# Altium PCB PCB12.pcbdoc
Units mm, origin at the board's own origin, x right, y up, seen from the top; angles counter-clockwise.
Board outline 183.15 x 75 mm, 2 copper layers (Top Layer, Bottom Layer); 117 components, 94 nets, 493 pads, 179 vias.
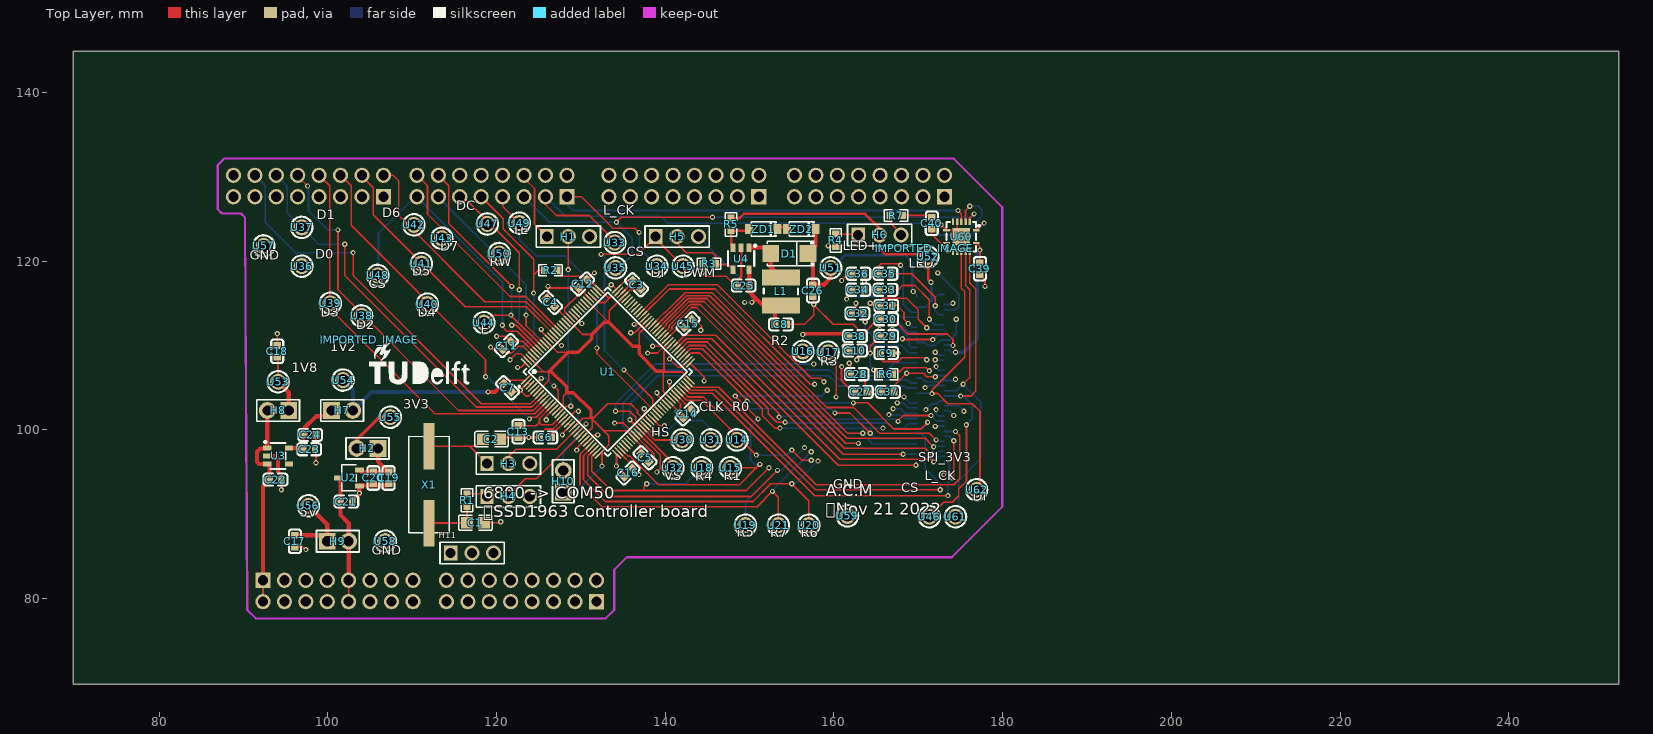
[diagram p0: Top Layer view]
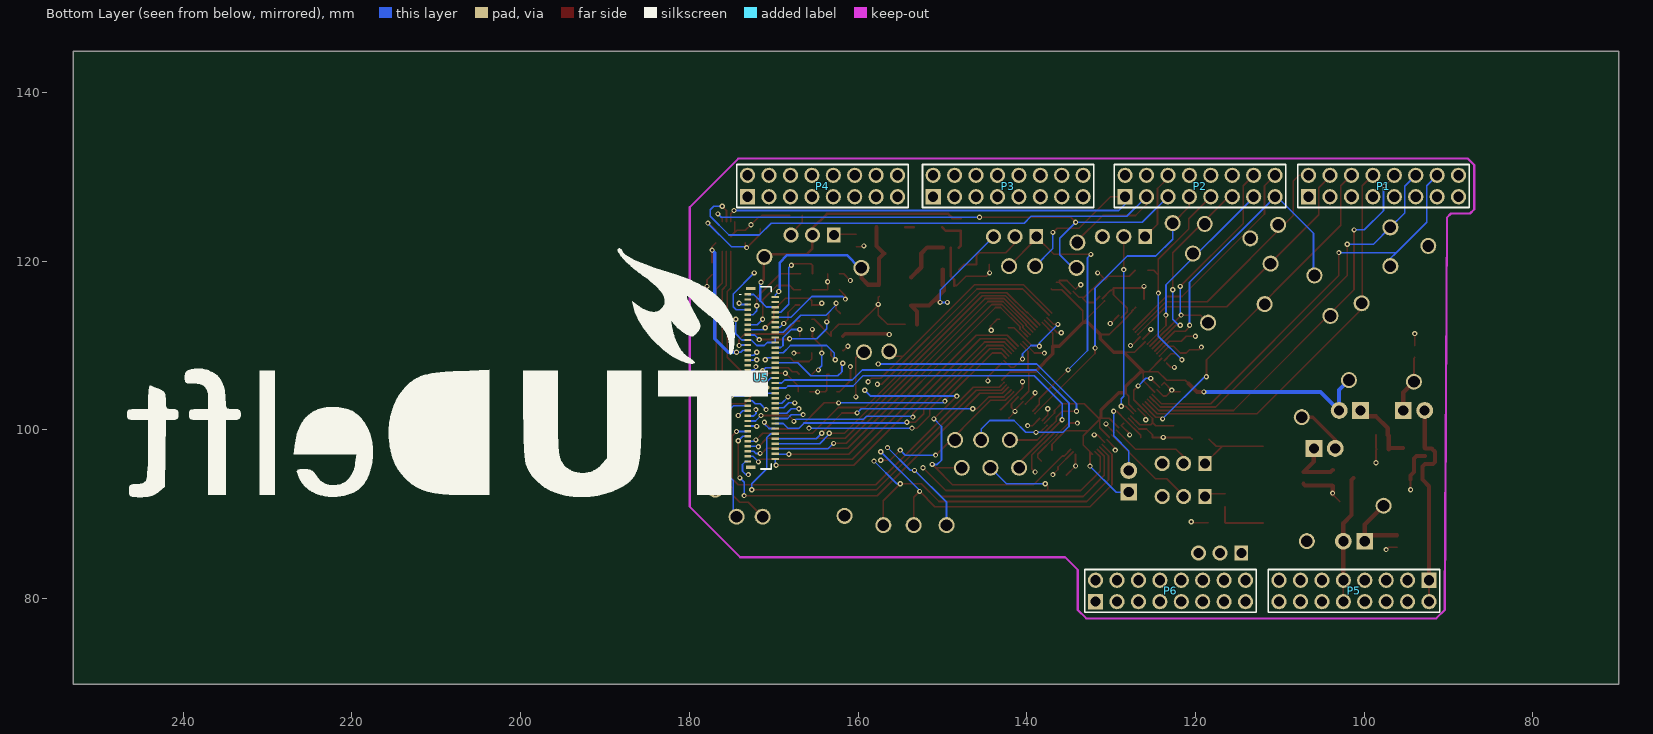
[diagram p1: Bottom Layer view, seen from below]

## Layer stack, top to bottom
Top Layer: signal copper (thickness not stored)
Dielectric: dielectric 0.32, FR-4, Dk 4.8
Bottom Layer: signal copper (thickness not stored)

## Board outline
252.996,69.85 69.85,69.85 69.85,144.85 252.996,144.85

## Components (designator, comment, footprint, x,y, rotation, side; value= is the part's Value field where it differs from the comment)
C1 "33pF" C0805 117.5,89 r180 top
C2 "33pF" C0805 119.4,98.9 r180 top
C3 "1uF" C0603 136.605,117.195 r315 top
C4 "100nF" C0603 126.4,115.1 r315 top
C5 "100nF" C0603 137.6,96.7 r135 top
C6 "1uF" C0603 125.8,99.1 r0 top
C7 "1uF" C0603 121.305,104.995 r135 top
C8 "10uF" C0603 153.7,112.5 r180 top
C9 "2.2uF" C0603 166.2,109.1 r0 top
C10 "2.2uF" C0603 162.5,109.4 r180 top
C11 "100nF" C0603 121.195,109.995 r45 top
C12 "100nF" C0603 130.205,117.305 r45 top
C13 "100nF" C0603 122.6,99.8 r90 top
C14 "100nF" C0603 142.605,101.905 r45 top
C15 "100nF" C0603 142.695,112.595 r225 top
C16 "100nF" C0603 135.6,94.9 r45 top
C17 "10uF" C0603 96.1,86.8 r90 top
C18 "10uF" C0603 94,109.3 r270 top
C19 "10uF" C0603 107.2,94.3 r90 top
C20 "100nF" C0603 105.4,94.3 r90 top
C21 "10uF" C0603 102.2,91.5 r180 top
C22 "10uF" C0603 93.8,94.1 r180 top
C23 "10uF" C0603 97.8,97.7 r180 top
C24 "100nF" C0603 97.9,99.4 r180 top
C25 "10uF" C0603 149.3,117.1 r0 top
C26 "10uF" C0603 157.5,116.5 r270 top
C27 "1uF" C0603 163.2,104.5 r0 top
C28 "10uF" C0603 162.7,106.6 r180 top
C29 "10uF" C0603 166.2,111.1 r0 top
C30 "2.2uF" C0603 166.2,113.1 r0 top
C31 "2.2uF" C0603 166.2,114.7 r180 top
C32 "2.2uF" C0603 162.8,113.8 r0 top
C33 "10uF" C0603 166.1,116.6 r180 top
C34 "2.2uF" C0603 162.9,116.6 r0 top
C35 "1uF" C0603 166.1,118.5 r180 top
C36 "2.2uF" C0603 162.9,118.5 r180 top
C37 "1uF" C0603 166.4,104.5 r180 top
C38 "10uF" C0603 162.5,111.1 r0 top
C39 "100nF" C0603 177.3,119.1 r270 top
C40 "100nF" C0603 171.6,124.5 r90 top
D1 "SS210" SMA_L4.3-W2.6-LS5.2-RD 154.7,120.9 r180 top
H1 "2.54-1*3P针" HDR-TH_3P-P2.54-V-M-1 128.5,122.9 r0 top
H2 "PZ254V-11-02P" HDR-TH_2P-P2.54-V-M 104.7,97.8 r180 top
H3 "2.54-1*3P针" HDR-TH_3P-P2.54-V-M-1 121.4,96 r0 top
H4 "2.54-1*3P针" HDR-TH_3P-P2.54-V-M-1 121.4,92.1 r0 top
H5 "2.54-1*3P针" HDR-TH_3P-P2.54-V-M-1 141.4,122.9 r0 top
H6 "2.54-1*3P针" HDR-TH_3P-P2.54-V-M-1 165.4,123.1 r0 top
H7 "PZ254V-11-02P" HDR-TH_2P-P2.54-V-M 101.7,102.3 r0 top
H8 "PZ254V-11-02P" HDR-TH_2P-P2.54-V-M 94.1,102.3 r180 top
H9 "PZ254V-11-02P" HDR-TH_2P-P2.54-V-M 101.2,86.8 r0 top
H10 "PZ254V-11-02P" HDR-TH_2P-P2.54-V-M 127.9,93.9 r90 top
H11 "2.54-1*3P针" HDR-TH_3P-P2.54-V-M-1 117.1,85.4 r0 top
IMPORTED_IMAGE "IMPORTED_IMAGE" IMPORTED_IMAGE 104.9,110.7 r0 top
IMPORTED_IMAGE "IMPORTED_IMAGE" IMPORTED_IMAGE 170.7,121.5 r0 top
L1 "15uH" IND-SMD_L4.5-W4.0_SCD0403T 153.7,116.4 r90 top
P1 "2.54-2*8P针" HDR-TH_16P-P2.54-V-M-R2-C8-S2.54 97.7,128.9 r180 bottom
P2 "2.54-2*8P针" HDR-TH_16P-P2.54-V-M-R2-C8-S2.54 119.45,128.9 r180 bottom
P3 "2.54-2*8P针" HDR-TH_16P-P2.54-V-M-R2-C8-S2.54 142.2,128.9 r180 bottom
P4 "2.54-2*8P针" HDR-TH_16P-P2.54-V-M-R2-C8-S2.54 164.2,128.9 r180 bottom
P5 "2.54-2*8P针" HDR-TH_16P-P2.54-V-M-R2-C8-S2.54 101.2,80.9 r0 bottom
P6 "2.54-2*8P针" HDR-TH_16P-P2.54-V-M-R2-C8-S2.54 122.95,80.9 r180 bottom
R1 "120Ω" R0603 116.5,91.653 r90 top
R2 "100kΩ" R0603 126.4,118.9 r0 top
R3 "100kΩ" R0603 145.2,119.7 r0 top
R4 "0603WAF220JT5E" R0603 160.2,122.447 r270 top
R5 "100Ω" R0603 147.8,124.347 r90 top
R6 "10kΩ" R0603 166.2,106.6 r180 top
R7 "10Ω" R0603 167.353,125.4 r0 top
U1 "SSD1963QL9" LQFP-128_L14.0-W14.0-P0.40-LS16.0-BL 133.2,106.9 r315 top
U2 "XC6206P332MR" SOT-23-3_L2.9-W1.6-P1.90-LS2.8-BR 102.5,94.3 r0 top
U3 "AP2127K-1.2TRG1" SOT-23-5_L3.0-W1.7-P0.95-LS2.8-BR 94.1,96.9 r180 top
U4 "-" SOT-23-5_L3.0-W1.7-P0.95-LS2.8-BR 149,120.3 r90 top
U5 "FH26G-67S-0.3SHBW_05_" FH26G67S03SHBW05 171.7,106.15 r270 bottom
U14 "5001" TEST-TH_BD2.54-P1.39 148.5,98.8 r0 top
U15 "5001" TEST-TH_BD2.54-P1.39 147.7,95.5 r0 top
U16 "5001" TEST-TH_BD2.54-P1.39 156.3,109.3 r0 top
U17 "5001" TEST-TH_BD2.54-P1.39 159.3,109.2 r0 top
U18 "5001" TEST-TH_BD2.54-P1.39 144.3,95.5 r0 top
U19 "5001" TEST-TH_BD2.54-P1.39 149.5,88.7 r0 top
U20 "5001" TEST-TH_BD2.54-P1.39 157,88.7 r0 top
U21 "5001" TEST-TH_BD2.54-P1.39 153.4,88.7 r0 top
U30 "5001" TEST-TH_BD2.54-P1.39 142,98.8 r0 top
U31 "5001" TEST-TH_BD2.54-P1.39 145.4,98.8 r0 top
U32 "5001" TEST-TH_BD2.54-P1.39 140.9,95.5 r0 top
U33 "5001" TEST-TH_BD2.54-P1.39 134,122.2 r0 top
U34 "5001" TEST-TH_BD2.54-P1.39 139,119.4 r0 top
U35 "5001" TEST-TH_BD2.54-P1.39 134.1,119.2 r0 top
U36 "5001" TEST-TH_BD2.54-P1.39 96.9,119.4 r0 top
U37 "5001" TEST-TH_BD2.54-P1.39 96.9,124 r0 top
U38 "5001" TEST-TH_BD2.54-P1.39 104,113.5 r0 top
U39 "5001" TEST-TH_BD2.54-P1.39 100.3,115 r0 top
U40 "5001" TEST-TH_BD2.54-P1.39 111.8,114.9 r0 top
U41 "5001" TEST-TH_BD2.54-P1.39 111.1,119.7 r0 top
U42 "5001" TEST-TH_BD2.54-P1.39 110.2,124.3 r0 top
U43 "5001" TEST-TH_BD2.54-P1.39 113.5,122.7 r0 top
U44 "5001" TEST-TH_BD2.54-P1.39 118.5,112.7 r0 top
U45 "5001" TEST-TH_BD2.54-P1.39 142.1,119.4 r0 top
U46 "5001" TEST-TH_BD2.54-P1.39 171.3,89.7 r180 top
U47 "5001" TEST-TH_BD2.54-P1.39 118.9,124.4 r0 top
U48 "5001" TEST-TH_BD2.54-P1.39 105.9,118.3 r0 top
U49 "5001" TEST-TH_BD2.54-P1.39 122.7,124.5 r0 top
U50 "5001" TEST-TH_BD2.54-P1.39 120.3,120.9 r0 top
U51 "5001" TEST-TH_BD2.54-P1.39 159.6,119.2 r0 top
U52 "5001" TEST-TH_BD2.54-P1.39 171.1,120.5 r0 top
U53 "5001" TEST-TH_BD2.54-P1.39 94.1,105.7 r0 top
U54 "5001" TEST-TH_BD2.54-P1.39 101.8,105.9 r0 top
U55 "5001" TEST-TH_BD2.54-P1.39 107.4,101.5 r0 top
U56 "5001" TEST-TH_BD2.54-P1.39 97.7,91 r0 top
U57 "5001" TEST-TH_BD2.54-P1.39 92.4,121.8 r0 top
U58 "5001" TEST-TH_BD2.54-P1.39 106.8,86.8 r0 top
U59 "5001" TEST-TH_BD2.54-P1.39 161.6,89.8 r0 top
U60 "TXB0104RGYR" VQFN-14_L3.5-W3.5-P0.50-BL-EP 175.1,122.9 r180 top
U61 "5001" TEST-TH_BD2.54-P1.39 174.4,89.7 r180 top
U62 "5001" TEST-TH_BD2.54-P1.39 176.9,92.9 r180 top
X1 "6MHz" HC-49S_L11.4-W4.8 112,93.5 r270 top
ZD1 "MMSZ5240B" SOD-123_L2.8-W1.8-LS3.7-RD 151.6,123.8 r180 top
ZD2 "MMSZ5240B" SOD-123_L2.8-W1.8-LS3.7-RD 156.1,123.8 r180 top

## Footprints (in the part's own frame and the unit in brackets; to place one, negate y for a bottom-side part, rotate by r counter-clockwise, add the part's x,y. Pads: shape width x height; smd on the part's side, far side on the other; paste and mask are expansions set on the pad)
C0603 [mm]
  rect 0.8x0.9 smd paste+0 mask+0.051: 1(-0.7,0) 2(0.7,0)
  silkscreen extent -1.41,-0.71 1.39,0.72
C0805 [mm]
  rect 1.41x1.35 smd paste-100 mask+0.051: 1(-1,0) 2(1,0)
  silkscreen extent -1.96,-0.9 1.96,0.9
FH26G67S03SHBW05 [mm]
  rect 0.28x0.8 smd paste+0 mask+0.102: 1(-9.9,-1.375) 3(-9.3,-1.375) 5(-8.7,-1.375) 7(-8.1,-1.375) 9(-7.5,-1.375) 11(-6.9,-1.375) 13(-6.3,-1.375) 15(-5.7,-1.375) 17(-5.1,-1.375) 19(-4.5,-1.375) 21(-3.9,-1.375) 23(-3.3,-1.375) 25(-2.7,-1.375) 27(-2.1,-1.375) 29(-1.5,-1.375) 31(-0.9,-1.375) 33(-0.3,-1.375) 35(0.3,-1.375) 37(0.9,-1.375) 39(1.5,-1.375) 41(2.1,-1.375) 43(2.7,-1.375) 45(3.3,-1.375) 47(3.9,-1.375) 49(4.5,-1.375) 51(5.1,-1.375) 53(5.7,-1.375) 55(6.3,-1.375) 57(6.9,-1.375) 59(7.5,-1.375) 61(8.1,-1.375) 63(8.7,-1.375) 65(9.3,-1.375) 67(9.9,-1.375)
  rect 0.28x0.9 smd paste+0 mask+0.102: 2(-9.6,1.875) 4(-9,1.875) 6(-8.4,1.875) 8(-7.8,1.875) 10(-7.2,1.875) 12(-6.6,1.875) 14(-6,1.875) 16(-5.4,1.875) 18(-4.8,1.875) 20(-4.2,1.875) 22(-3.6,1.875) 24(-3,1.875) 26(-2.4,1.875) 28(-1.8,1.875) 30(-1.2,1.875) 32(-0.6,1.875) 34(0,1.875) 36(0.6,1.875) 38(1.2,1.875) 40(1.8,1.875) 42(2.4,1.875) 44(3,1.875) 46(3.6,1.875) 48(4.2,1.875) 50(4.8,1.875) 52(5.4,1.875) 54(6,1.875) 56(6.6,1.875) 58(7.2,1.875) 60(7.8,1.875) 62(8.4,1.875) 64(9,1.875) 66(9.6,1.875)
  rect 0.4x1.15 smd paste+0 mask+0.102: MP1(-10.6,-1) MP2(10.6,-1)
  silkscreen extent -10.8,-2.3 10.8,1.4
HC-49S_L11.4-W4.8 [mm]
  rect 5.5x1.3 smd paste+0 mask+0.051: 1(-4.553,0) 2(4.553,0)
  silkscreen extent -5.72,-2.41 5.72,2.41
HDR-TH_2P-P2.54-V-M [mm]
  rect 2x2 hole 1.2 paste+0 mask+0.051: 1(-1.27,0)
  round 2 hole 1.2 paste+0 mask+0.051: 2(1.27,0)
  silkscreen extent -2.54,-1.27 2.54,1.27
HDR-TH_3P-P2.54-V-M-1 [mm]
  rect 1.575x1.8 hole 1.2 paste+0 mask+0.051: 1(-2.54,0)
  round 1.8 hole 1.2 paste+0 mask+0.051: 2(0,0) 3(2.54,0)
  silkscreen extent -3.81,-1.27 3.81,1.27
HDR-TH_16P-P2.54-V-M-R2-C8-S2.54 [mm]
  rect 1.8x1.8 hole 1.2 paste+0 mask+0.051: 1(-8.89,-1.27)
  round 1.8 hole 1.2 paste+0 mask+0.051: 2(-8.89,1.27) 3(-6.35,-1.27) 4(-6.35,1.27) 5(-3.81,-1.27) 6(-3.81,1.27) 7(-1.27,-1.27) 8(-1.27,1.27) 9(1.27,-1.27) 10(1.27,1.27) 11(3.81,-1.27) 12(3.81,1.27) 13(6.35,-1.27) 14(6.35,1.27) 15(8.89,-1.27) 16(8.89,1.27)
  silkscreen extent -10.16,-2.54 10.16,2.54
IMPORTED_IMAGE [mm]
  silkscreen extent 0,-5.3 11.9,0
IND-SMD_L4.5-W4.0_SCD0403T [mm]
  rect 1.9x4.5 smd paste+0 mask+0.051: 1(-1.675,0) 2(1.675,0)
  silkscreen extent -0.37,-2.03 0.37,2.03
LQFP-128_L14.0-W14.0-P0.40-LS16.0-BL [mm]
  rect 0.2x1.46 smd paste+0 mask+0.051: 1(-6.2,-7.63) 2(-5.8,-7.63) 3(-5.4,-7.63) 4(-5,-7.63) 5(-4.6,-7.63) 6(-4.2,-7.63) 7(-3.8,-7.63) 8(-3.4,-7.63) 9(-3,-7.63) 10(-2.6,-7.63) 11(-2.2,-7.63) 12(-1.8,-7.63) 13(-1.4,-7.63) 14(-1,-7.63) 15(-0.6,-7.63) 16(-0.2,-7.63) 17(0.2,-7.63) 18(0.6,-7.63) 19(1,-7.63) 20(1.4,-7.63) 21(1.8,-7.63) 22(2.2,-7.63) 23(2.6,-7.63) 24(3,-7.63) 25(3.4,-7.63) 26(3.8,-7.63) 27(4.2,-7.63) 28(4.6,-7.63) 29(5,-7.63) 30(5.4,-7.63) 31(5.8,-7.63) 32(6.2,-7.63) 65(6.2,7.63) 66(5.8,7.63) 67(5.4,7.63) 68(5,7.63) 69(4.6,7.63) 70(4.2,7.63) 71(3.8,7.63) 72(3.4,7.63) 73(3,7.63) 74(2.6,7.63) 75(2.2,7.63) 76(1.8,7.63) 77(1.4,7.63) 78(1,7.63) 79(0.6,7.63) 80(0.2,7.63) 81(-0.2,7.63) 82(-0.6,7.63) 83(-1,7.63) 84(-1.4,7.63) 85(-1.8,7.63) 86(-2.2,7.63) 87(-2.6,7.63) 88(-3,7.63) 89(-3.4,7.63) 90(-3.8,7.63) 91(-4.2,7.63) 92(-4.6,7.63) 93(-5,7.63) 94(-5.4,7.63) 95(-5.8,7.63) 96(-6.2,7.63)
  rect 1.46x0.2 smd paste+0 mask+0.051: 33(7.63,-6.2) 34(7.63,-5.8) 35(7.63,-5.4) 36(7.63,-5) 37(7.63,-4.6) 38(7.63,-4.2) 39(7.63,-3.8) 40(7.63,-3.4) 41(7.63,-3) 42(7.63,-2.6) 43(7.63,-2.2) 44(7.63,-1.8) 45(7.63,-1.4) 46(7.63,-1) 47(7.63,-0.6) 48(7.63,-0.2) 49(7.63,0.2) 50(7.63,0.6) 51(7.63,1) 52(7.63,1.4) 53(7.63,1.8) 54(7.63,2.2) 55(7.63,2.6) 56(7.63,3) 57(7.63,3.4) 58(7.63,3.8) 59(7.63,4.2) 60(7.63,4.6) 61(7.63,5) 62(7.63,5.4) 63(7.63,5.8) 64(7.63,6.2) 97(-7.63,6.2) 98(-7.63,5.8) 99(-7.63,5.4) 100(-7.63,5) 101(-7.63,4.6) 102(-7.63,4.2) 103(-7.63,3.8) 104(-7.63,3.4) 105(-7.63,3) 106(-7.63,2.6) 107(-7.63,2.2) 108(-7.63,1.8) 109(-7.63,1.4) 110(-7.63,1) 111(-7.63,0.6) 112(-7.63,0.2) 113(-7.63,-0.2) 114(-7.63,-0.6) 115(-7.63,-1) 116(-7.63,-1.4) 117(-7.63,-1.8) 118(-7.63,-2.2) 119(-7.63,-2.6) 120(-7.63,-3) 121(-7.63,-3.4) 122(-7.63,-3.8) 123(-7.63,-4.2) 124(-7.63,-4.6) 125(-7.63,-5) 126(-7.63,-5.4) 127(-7.63,-5.8) 128(-7.63,-6.2)
  silkscreen extent -7.08,-8.76 7.08,7.08
R0603 [mm]
  rect 0.806x0.864 smd paste-100 mask+0.051: 1(-0.753,0) 2(0.753,0)
  silkscreen extent -1.39,-0.66 1.39,0.66
SMA_L4.3-W2.6-LS5.2-RD [mm]
  rect 2x2 smd paste+0 mask+0.051: 1(-2.2,0) 2(2.2,0)
  silkscreen extent -2.98,-1.5 2.6,1.5
SOD-123_L2.8-W1.8-LS3.7-RD [mm]
  rect 0.95x1.15 smd paste+0 mask+0.051: 1(-1.692,0) 2(1.692,0)
  silkscreen extent -1.58,-0.87 1.41,0.87
SOT-23-3_L2.9-W1.6-P1.90-LS2.8-BR [mm]
  rect 1.07x0.6 smd paste+0 mask+0.051: 1(1.235,-0.95) 2(1.235,0.95) 3(-1.235,0)
  silkscreen extent -0.88,-1.54 0.88,1.54
SOT-23-5_L3.0-W1.7-P0.95-LS2.8-BR [mm]
  rect 1x0.6 smd paste+0 mask+0.051: 1(1.3,-0.95) 2(1.3,0) 3(1.3,0.95) 4(-1.3,0.95) 5(-1.3,-0.95)
  silkscreen extent -0.9,-1.78 1.65,1.55
TEST-TH_BD2.54-P1.39 [mm]
  round 1.9 hole 1.39 paste+0 mask+0.051: 1(0,0)
  silkscreen extent -1.27,-1.27 1.27,1.27
VQFN-14_L3.5-W3.5-P0.50-BL-EP [mm]
  rect 0.8x0.28 smd paste-100 mask+0.051: 1(-1.75,-0.75) 7(1.75,-0.75) 8(1.75,0.75) 14(-1.75,0.75)
  rect 0.28x0.8 smd paste-100 mask+0.051: 2(-0.998,-1.75) 3(-0.498,-1.75) 4(0.002,-1.75) 5(0.502,-1.75) 6(1.002,-1.75) 9(1,1.75) 10(0.5,1.75) 11(0,1.75) 12(-0.5,1.75) 13(-1,1.75)
  rect 2.05x2.05 smd paste-100 mask+0.051: 15(0,0)
  silkscreen extent -2.2,-1.75 1.75,1.75

## Via types
v1: diameter 0.61, hole 0.305, Top Layer to Bottom Layer, 179 vias

## Nets (pads, with @x,y where several pads share a name; then routed paths per layer and width w, separated by ;. In a path a pad name is that pad's centre, name@x,y a point inside that pad or via, vN(x,y) a via of type N, cw(c..) or ccw(c..) an arc to the next point about the centre after c; other vN are vias at no path point)
1V2: C3.2 C4.2 C5.2 C7.2 H7.2 H10.1 U1.1 U1.6 U1.14 U1.21 U1.25 U1.32 U1.40 U1.46 U1.56 U1.64 U1.73 U1.82 U1.93 U1.102 U1.110 U1.119 U1.126 U54.1 | length 129.7
  Top Layer w0.2: C7.2@120.81,105.49 121.209,105.889 U1.1 124.432,106.9 125.563,106.9 ; U1.126 125.563,106.9 ; U1.6 126.2,105.84 126.2,106.9 125.563,106.9 ; U1.119 127.223,109.2 128.5,109.2 ; U1.14 127.9,103.014 127.9,104 128.3,104.4 ; C4.2@127.1,114.5 127.553,114.047 127.553,113.961 U1.110 130.214,111.3 131.3,111.3 ; U1.21 130.208,101.362 131.338,101.362 ; U1.25 131.338,100.229 131.338,101.248 ; U1.102 133.266,112.774 ; U1.32 132.221,97.121 U1.32@132.5,97.4 ; v1(132.5,95.7) U1.32@132.5,97.4 ; 133.354,112.686 133.354,114.125 U1.93 135.829,116.6 137,116.6 C3.2 ; 136.9,109.9 136.9,111.449 U1.82 ; C5.2@137,97.6 137,98.292 U1.40 135.41,99.882 132.704,99.882 ; U1.46 136.7,101.986 136.7,102.3 135.9,103.1 133.189,103.1 131.338,101.248 ; U1.56 139.758,104.585 139.758,106.762 139.844,106.848 ; U1.73 139.844,109.301 139.844,106.956 139.844,106.848 ; U1.64 142.02,106.848 139.844,106.848 ; 131.338,101.248 132.704,99.882 ; U1.32@132.5,97.4 133.3,98.2 133.3,99.286 132.704,99.882
  Top Layer w0.4: 131.338,101.362 131.2,101.5 131.2,102.3 129.1,104.4 128.3,104.4 128.3,105.1 126.5,106.9 126.2,106.9 128.5,109.2 129.7,109.2 131.3,110.8 131.3,111.3 132.774,112.774 133.266,112.774 ; 133.354,112.686 136.14,109.9 136.9,109.9 136.9,109 138.944,106.956 139.844,106.956
  Top Layer w0.5: v1(119,104.5) 119.82,104.5 C7.2@120.81,105.49
  Bottom Layer w0.2: H10.1@127.9,92.6 129.4,92.6 v1(132.5,95.7)
  Bottom Layer w0.5: U54.1 102.97,104.73 H7.2 105.17,104.5 v1(119,104.5)
1V8: C11.2 C12.2 C13.2 C18.2 C40.1 H8.1 R2.2 U1.4 U1.12 U1.16 U1.95 U1.97 U1.100 U1.108 U1.117 U1.124 U53.1 U60.1 U60.8 | length 53.3
  Top Layer w0.2: C18.2 94.1,108.5 U53.1 ; v1(120,111.1) 121.08,111.1 C11.2 123.105,110.49 U1.124 ; C13.2 124.7,100.5 125.054,100.854 ; U1.4 125.3,106.071 v1(125.3,106.1) ; U1.117 127.554,110 v1(127.7,110) ; v1(126.8,105.2) 127.3,104.7 127.3,103.546 U1.12 125.1,101.346 125.1,100.9 125.054,100.854 ; R2.2 127.853,118.2 130.3,118.2 C12.2 ; U1.16 126.617,100.6 125.308,100.6 125.054,100.854 ; U1.108 130.046,112.6 v1(130.1,112.6) ; U1.100 132.071,115.1 132.9,115.1 133.377,115.577 133.377,115.7 ; v1(131.6,118.6) 131.5,118.6 C12.2 ; U1.95 133.797,115.7 133.377,115.7 ; C40.1 171.6,123.2 v1(173.2,121.6) 173.35,121.75 U60.8 ; U60.1 177.7,124.5 v1(177.8,124.5) ; C12.2 131.068,117.8 U1.97 132.221,116.679 133.2,115.7 133.377,115.7
  Top Layer w0.5: U53.1 95.37,104.43 H8.1
  Bottom Layer w0.2: v1(125.3,106.1) 125.9,106.1 v1(126.8,105.2) ; v1(173.2,121.6) 173.3,121.7 175,121.7 v1(177.8,124.5)
3V3: C14.2 C15.2 C16.2 C38.1 C39.1 H2.2 U1.27 U1.34 U1.42 U1.48 U1.54 U1.58 U1.66 U1.75 U1.84 U5.23 U55.1 U60.14 | length 95.6
  Top Layer w0.2: U1.27 131.64,99.4 v1(132,99.4) ; U1.34 136.297,95.6 136.3,95.6 136.3,95.3 v1(136.9,94.7) ; v1(136.3,112.5) 136.82,112.5 U1.84 ; U1.42 139.4,97.023 139.4,95.4 v1(139,95) ; U1.48 139.317,100.5 v1(139.9,100.5) ; v1(138.5,109.9) 139.311,109.9 U1.75 141.511,112.1 C15.2 ; v1(139,104.4) 139,104.211 U1.54 ; v1(140.5,105.7) 140.5,104.974 U1.58 143.074,102.4 C14.2 ; v1(140.5,108.4) 141.5,107.4 141.903,107.4 U1.66 ; U60.14 177.3,121.7 v1(177.3,121.3) C39.1
  Top Layer w0.4: H2.2 103.43,98.83 106.1,101.5 U55.1 ; v1(156.3,111.3) 156.4,111.4 161.5,111.4 C38.1
  Inner2 w0.2: U55.1 110.1,101.5 111.4,100.2
  Inner2 w0.4: 152.9,111.3 v1(156.3,111.3) 158.9,113.9 172.2,113.9 174.9,111.2 174.9,109.6 174.5,109.2 v1(174.4,109.2)
  Bottom Layer w0.2: v1(136.3,112.5) 138.5,110.3 v1(138.5,109.9) 138.6,110 139.5,110 140.5,109 v1(140.5,108.4) ; U5.23 173.65,109.45 173.9,109.2 v1(174.4,109.2)
  Bottom Layer w0.4: v1(174.4,109.2) 175.4,109.2 177,110.8 177,121 v1(177.3,121.3)
5V: C8.2 C17.2 C25.2 H5.3 H9.1 L1.1 U4.5 U56.1 | length 96.6
  Top Layer w0.5: C17.2 99.23,87.5 H9.1 99.93,88.77 U56.1 ; U4.5 149.95,117.1 149.8,117.1 149.8,116.5 150.731,115.569 ; v1(150.261,115.1) 150.731,115.569 ; C8.2 153,114.025 L1.1 151.575,114.725 150.731,115.569
  Inner2 w0.5: U56.1 97.7,91.8 100.6,94.7 100.6,98.7 102,100.1 104.2,100.1 105,100.9 105,102.722 106.078,103.8 106.086,103.793 133.793,103.793 145.1,115.1 v1(149.4,115.1)
  Bottom Layer w0.2: H5.3 150.261,116.579 v1(150.261,115.1) v1(149.4,115.1)
$1N1944: C1.2 R1.1 X1.2 | length 6.4
  Top Layer w0.2: X1.2 116.447,88.947 C1.2 R1.1@116.5,90.9
$1N34225: C6.2 H10.2 U1.18 | length 12.4
  Top Layer w0.2: C6.2 126.5,99.352 U1.18 129.348,102.2 v1(129.7,102.2)
  Bottom Layer w0.2: H10.2@127.9,95.14 127.9,97.5 129.7,99.3 v1(129.7,102.2)
$2N8153: D1.2 L1.2 U4.1 | length 6.2
  Top Layer w0.5: U4.1 151.8,121.6 D1.2 152.5,119.275 L1.2
$2N8349: R5.1 U4.3 ZD1.2 | length 4.5
  Top Layer w0.3: U4.3 147.8,121.85 R5.1 149.601,123.593 ZD1.2@150.008,124
$2N9182: ZD1.1 ZD2.2 | length 1
  Top Layer w0.3: ZD1.1@153.392,124 ZD2.2@154.408,124
$2N12518: H6.1 R4.1 | length 2.7
  Top Layer w0.2: R4.1 162.76,123.2 H6.1
$2N12753: H6.3 R7.1 | length 2.9
  Top Layer w0.2: R7.1 166.6,124.6 167.94,123.26 H6.3
$2N22842: C19.2 C20.2 H2.1 U2.2 | length 6.9
  Top Layer w0.5: U2.2 103.985,95 C20.2 C19.2 105.97,96.23 H2.1
$2N23018: C23.2 C24.2 H7.1 U3.5 | length 8.4
  Top Layer w0.5: U3.5 96.95,97.85 C23.2 97.1,99.3 C24.2 97.2,100.2 98.6,101.6 99.73,101.6 H7.1
$3N2127: C27.1 U5.31 | length 17.2
  Top Layer w0.2: v1(160.9,107.5) 160.9,105.8 162.2,104.5 C27.1
  Inner2 w0.2: v1(160.9,107.5) 161.4,107 162.6,107 163.7,108.1 170.2,108.1 170.6,107.7 171.9,107.7 v1(172.1,107.5)
  Bottom Layer w0.2: v1(172.1,107.5) 172.1,107.3 172.35,107.05 U5.31
$3N2261: R6.1 U5.30 | length 6.4
  Top Layer w0.2: R6.1 167.253,106.9 167.8,106.9 168.25,107.35 170.95,107.35 v1(171.3,107)
  Bottom Layer w0.2: U5.30 170.95,107.35 v1(171.3,107)
$3N2380: C28.2 U5.28 | length 11.2
  Top Layer w0.2: v1(161.8,107.9) 162,107.7 C28.2
  Bottom Layer w0.2: v1(161.8,107.9) 161.9,107.8 161.9,106.9 162.4,106.4 165.6,106.4 167.15,107.95 U5.28
$3N2608: C9.2 U5.27 | length 6.5
  Top Layer w0.2: C9.2 v1(167.6,109.1)
  Inner2 w0.2: v1(167.6,109.1) 171.2,109.1 v1(172,108.3)
  Bottom Layer w0.2: v1(172,108.3) 172.05,108.25 U5.27
$3N2615: C10.1 U5.24 | length 9.9
  Top Layer w0.2: v1(162.7,108.3) 163.2,108.8 C10.1
  Bottom Layer w0.2: v1(162.7,108.3) 162.8,108.4 162.8,109.1 163.7,110 168,110 168.85,109.15 U5.24
$3N2865: C29.2 U5.22 | length 5.1
  Top Layer w0.2: C29.2 v1(166.9,111.9)
  Bottom Layer w0.2: v1(166.9,111.9) 167.9,111.9 168.9,110.9 168.9,110 169.15,109.75 U5.22
$3N3020: C30.2 U5.21 | length 9.9
  Top Layer w0.2: C30.2@166.9,112.9 167.3,112.9 167.6,112.6 167.6,112.5 168.743,111.357 173.443,111.357 174.1,110.7 v1(174.1,110)
  Bottom Layer w0.2: U5.21 174.05,110.05 v1(174.1,110)
$3N3372: C32.2 U5.17 | length 12
  Top Layer w0.2: C32.2 163.5,113 v1(163.7,112.8) ; v1(168.1,110.8) 168.2,110.7 v1(171.7,110.7)
  Bottom Layer w0.2: v1(163.7,112.8) 163.7,112 164.9,110.8 v1(168.1,110.8) ; v1(171.7,110.7) 172.25,111.25 U5.17
$3N3385: C31.1 U5.14 | length 4.5
  Top Layer w0.2: C31.1@166.9,114.8 167.4,114.8 168.3,113.9 168.3,113.1 v1(168.8,112.6)
  Bottom Layer w0.2: v1(168.8,112.6) 169.248,112.152 U5.14@169.825,112.152
$3N3630: C33.1 U5.13 | length 9.8
  Top Layer w0.2: C33.1 167.6,116.6 168.1,117.1 169.6,117.1 171.3,115.4 v1(171.3,113.1)
  Bottom Layer w0.2: v1(171.3,113.1) 171.95,112.45 U5.13
$3N3916: C34.1 U5.10 | length 10.9
  Top Layer w0.2: v1(161.5,115.5) 161.5,115.9 C34.1
  Bottom Layer w0.2: v1(161.5,115.5) 161.8,115.8 165.5,115.8 167.95,113.35 U5.10
$3N4074: C35.1 U5.9 | length 9.2
  Top Layer w0.2: C35.1 169.2,118.5 172,115.7 v1(172,114.7)
  Bottom Layer w0.2: v1(172,114.7) 172,114.1 172.45,113.65 U5.9
$3N4370: C36.2 U5.7 | length 20.3
  Top Layer w0.2: v1(160.9,117.7) 161.7,118.5 C36.2
  Inner2 w0.2: v1(160.9,117.7) 161.7,118.5 172.2,118.5 v1(172.3,118.6)
  Bottom Layer w0.2: v1(172.3,118.6) 174.8,116.1 174.8,114.6 174.45,114.25 U5.7
$3N5052: C37.1 U5.33 | length 7.6
  Top Layer w0.2: C37.1 167.1,105.2 v1(168.6,106.7) 170.6,106.7 171,106.3 v1(172,106.3)
  Bottom Layer w0.2: v1(172,106.3) 172,106.4 172.05,106.45 U5.33
APO_1V8: C22.2 H8.2 P5.1 P5.2 U3.1 U3.3 | length 25.1
  Top Layer w0.2: P5.2 P5.1
  Top Layer w0.5: P5.1 92.31,93.31 C22.2 93.1,95.65 U3.3 91.85,95.95 91.6,96.2 91.6,97.4 92,97.8 92.75,97.8 U3.1 ; U3.1@92.83,97.88 H8.2
APO_5V: C21.2 H9.2 P5.9 P5.10 U2.3 | length 15.2
  Top Layer w0.2: P5.10 P5.9
  Top Layer w0.5: U2.3 101.5,94.065 C21.2 101.5,89.9 102.47,88.93 H9.2 P5.9
BKL_DIMM: H5.2 R3.2 U4.4 | length 9.3
  Top Layer w0.2: H5.2 141.4,122.1 142.5,121 145.6,121 145.953,120.647 145.953,119.6 147.45,119.6 U4.4
GND: C1.1 C2.1 C3.1 C4.1 C5.1 C6.1 C7.1 C8.1 C11.1 C12.1 C13.1 C14.1 C15.1 C16.1 C17.1 C18.1 C19.1 C20.1 C21.1 C22.1 C23.1 C24.1 C25.1 C26.2 C27.2 C28.1 C30.1 C33.2 C34.2 C36.1 C37.2 C38.2 C39.2 C40.2 H1.3 H3.3 H11.1 H11.2 H11.3 P1.16 P5.11 P5.12 R3.1 R4.2 R7.2 U1.2 U1.3 U1.5 U1.13 U1.17 U1.19 U1.20 U1.23 U1.26 U1.33 U1.41 U1.47 U1.55 U1.57 U1.65 U1.74 U1.83 U1.94 U1.96 U1.101 U1.109 U1.118 U1.125 U1.128 U2.1 U3.2 U4.2 U5.18 U5.19 U5.20 U5.34 U5.35 U57.1 U58.1 U59.1 U60.5 U60.7 U60.15 | length 152.2
  Top Layer w0.2: C18.1 v1(94,111.4) ; v1(94.5,92.9) C22.1 ; C17.1 97.1,86.1 v1(97.4,85.8) ; v1(98.6,96.1) 98.6,97.6 98.5,97.7 98.6,97.8 C24.1 ; C21.1 v1@103.735,92.335 ; C1.1 120.4,89 v1(120.5,89.1) ; v1(119.3,109.8) 119.6,109.5 C11.1 121.1,109.1 121.8,109.1 122.6,109.9 123.129,109.9 U1.125 ; C2.1 120.6,99.1 C13.1 v1(123.815,99.1) C6.1 125.1,99.4 125.8,100.1 126.683,100.1 U1.17 ; C7.1 122.597,104.5 v1(122.805,104.707) ; v1(122.5,107.4) 122.91,107.4 U1.128 ; U1.3 U1.2 v1(122.805,104.707) ; U1.5 123.795,104 123.5,104 122.805,104.695 v1(122.805,104.707) ; v1(125.3,111.9) 125.3,111.689 U1.118 ; v1(125.9,101.2) 125.9,101.58 U1.13 ; v1(126.1,117) v1@126.11,116.99 ; C4.1@126.11,115.49 v1@126.11,116.99 ; v1(127.8,99.4) 127.8,99.52 U1.20 U1.19 ; U1.109 128.1,113.98 128.1,114.4 129.71,116.01 C12.1 ; v1(129.5,97.6) 129.5,97.826 U1.26 ; U1.23 130.6,100.623 v1(130.6,100.7) ; U1.101 130.099,116.507 130.014,116.507 C12.1 ; v1(133.6,117.2) 133.69,117.2 U1.96 135.222,117.69 C3.1 ; v1(134,100.8) 135.057,100.8 U1.41 136.474,99.326 138.7,97.1 138.7,96.72 C5.1@138.29,96.31 ; U1.33 v1(134.211,95.709) C16.1@135.31,94.61 ; U1.94 136.163,117.5 136.5,117.5 ; v1(135.9,111.5) 136.386,111.5 U1.83 ; v1(137.5,102.5) 137.5,101.752 U1.47 ; v1(137.9,109.1) 139.077,109.1 U1.74 ; U1.55 141.392,102.385 v1(141.392,102.192) ; U1.57 141.8,103.108 141.8,102.6 v1(141.392,102.192) ; C14.1 141.392,102.128 v1(141.392,102.192) ; U1.65 144.6,106.29 v1(144.6,105.8) ; C15.1 143.51,113.09 144.3,112.3 144.3,111.9 v1(144.2,111.8) ; R3.1@144.447,119.6 144.447,118.647 v1(144.4,118.6) 144.8,118.2 147.2,118.2 148.3,117.1 C25.1 ; C8.1 156.5,112.5 157.6,113.6 v1@157.6,114.8 ; C26.2 157.6,115.7 v1(157.6,114.864) v1@157.6,114.8 ; v1(159.3,121.8) 159.407,121.693 R4.2 ; C28.1 163.7,106.6 163.7,104.7 C27.2 v1(164.792,104.5) C37.2 ; C36.1 v1(163.6,117.556) C34.2 C33.2 ; C30.1@165.5,113.1 165.2,113.1 C38.2 163.2,111.6 162.3,112.5 159.9,112.5 v1@157.6,114.8 ; R7.2 171.4,125.4 C40.2 171.8,125.2 v1(172.687,124.313) U60.7 174.35,123.65 U60.15@174.598,123.402 ; U60.5 U60.15@174.598,123.402 ; U60.15 U60.15@174.598,123.402 ; C39.2 177.9,117.8 v1(177.9,117) ; v1@126.11,116.99 126.29,116.81 C12.1
  Top Layer w0.3: C25.1 148.6,117.8 149,118.2 U4.2
  Top Layer w0.5: U3.2 93.8,96.9 94.1,96.6 94.1,95 94.5,94.6 C22.1 ; v1@103.735,92.335 U2.1 103.785,93.4 107,93.4 C19.1
  Bottom Layer w0.2: U5.34 170.35,106.15 170.8,105.7 172.5,105.7 172.65,105.85 U5.35 174.25,105.85 v1(174.4,106) ; U5.18 U5.20 170.75,110.35 171.1,110 172,110 172.65,110.65 U5.19 173.775,110.65 174.5,111.375 v1(174.5,113.1)
  other v1: 103.735,92.5
GP_11_TE: P2.7 U1.50 U49.1 | length 35.3
  Top Layer w0.2: P2.7 120.72,126.48 U49.1 ; v1(131.9,109.7) 131.9,109.048 U1.50
  Bottom Layer w0.2: U49.1 122.7,122.6 124.7,120.6 128.1,120.6 131.9,116.8 v1(131.9,109.7)
GP_33_SSDCLK: H1.1 P2.6 | length 8.4
  Top Layer w0.2: P2.6 123.26,129.84 124.5,128.6 124.5,124.36 H1.1
GP_52_RW: P2.13 U1.120 U50.1 | length 22.7
  Top Layer w0.2: v1(123.5,113.6) 123.5,112.357 U1.120
  Bottom Layer w0.2: P2.13 113.1,127.588 123.5,117.188 v1(123.5,113.6)
GP_53_CS: P2.15 U1.123 U48.1 | length 36.4
  Top Layer w0.2: v1(120.7,112.4) 120.7,112.2 121.2,111.7 122.46,111.7 U1.123
  Bottom Layer w0.2: U48.1 106,118.4 106,123.3 110.33,127.63 P2.15 120.7,117.49 v1(120.7,112.4)
GP_64_D0: P1.14 U1.7 U36.1 | length 51.4
  Top Layer w0.2: v1(103,121) 103,118.3 118.2,103.1 124.026,103.1 U1.7
  Bottom Layer w0.2: P1.14 92.601,128.919 92.601,124.599 96.2,121 ; U36.1 96.9,120.3 96.2,121 ; v1(103,121) 96.2,121
GP_65_D1: P1.12 U1.8 U37.1 | length 47.4
  Top Layer w0.2: v1(102,122) 102,118.3 117.6,102.7 124.192,102.7 U1.8
  Bottom Layer w0.2: P1.12 95.2,128.86 95.2,125.7 U37.1 98.9,122 v1(102,122)
GP_66_D2: P1.10 U1.9 U38.1 | length 47.2
  Top Layer w0.2: P1.10 96.43,130.07 v1(97.6,128.9) ; v1(101.2,123.7) 101.2,116.6 115.5,102.3 124.357,102.3 U1.9
  Bottom Layer w0.2: v1(97.6,128.9) 97.7,128.8 97.7,126 100,123.7 v1(101.2,123.7)
GP_67_D3: P1.8 U1.10 U39.1 | length 47.8
  Top Layer w0.2: P1.8 100.221,128.919 100.221,114.379 112.7,101.9 124.523,101.9 U1.10
GP_68_D4: P1.6 U1.11 U40.1 | length 41.3
  Top Layer w0.2: P1.6 102.761,128.919 102.761,124.239 118.7,108.3 v1(118.7,106.3) ; v1(123.9,101.3) 124.1,101.5 124.689,101.5 U1.11
  Bottom Layer w0.2: v1(118.7,106.3) 118.9,106.3 v1(123.9,101.3)
GP_69_D5: P1.4 U1.116 U41.1 | length 32.5
  Top Layer w0.2: P1.4 104.05,130.05 105.4,128.7 105.4,125.5 116.3,114.6 123.52,114.6 U1.116
GP_70_D6: P1.2 U1.115 U42.1 | length 30.6
  Top Layer w0.2: P1.2 107.73,130.17 108.4,129.5 108.4,125.4 118.6,115.2 123.486,115.2 U1.115
GP_71_D7: P2.16 U1.114 U43.1 | length 26.4
  Top Layer w0.2: P2.16 111.811,128.919 111.811,125.589 121.6,115.8 123.452,115.8 U1.114
GP_72_E: P2.14 U1.121 U44.1 | length 29
  Top Layer w0.2: P2.14 114.351,128.919 114.351,124.449 v1(121.8,117) ; U44.1 119.4,113.6 v1(121.7,113.6) 125.401,109.899 U1.121
  Bottom Layer w0.2: v1(121.7,113.6) 121.8,113.7 v1(121.8,117)
GP_90_RESET: P2.9 R2.1 U1.127 | length 27.3
  Top Layer w0.2: P2.9 120.8,125.01 120.8,123.8 124.4,120.2 124.4,118.357 ; v1(121.6,108.3) 122.3,109 122.897,109 U1.127 ; v1(124.4,116.2) 124.4,118.357 ; R2.1 124.943,118.9 124.4,118.357
  Bottom Layer w0.2: v1(121.6,108.3) 124.4,111.1 v1(124.4,116.2)
GP_91_DC: P2.11 U1.122 U47.1 | length 23.4
  Top Layer w0.2: P2.11 116.07,127.63 122.7,121 v1(122.7,116.6) ; v1(121.8,112.4) 122.326,112.4 U1.122
  Bottom Layer w0.2: v1(121.8,112.4) 122,112.4 122.7,113.1 v1(122.7,116.6)
LCD_B0: U1.81 U5.59 | length 43.5
  Top Layer w0.2: U1.81 139.917,113.9 140.002,113.9 142.364,116.262 145.538,116.262 159.157,102.643 162.357,102.643 165.4,99.6 171.3,99.6 v1(172.1,98.8)
  Bottom Layer w0.2: v1(172.1,98.8) 172.25,98.65 U5.59
LCD_B1: U1.80 U5.60 | length 40
  Top Layer w0.2: U1.80 138.754,112.154 142.51,115.91 145.29,115.91 161.6,99.6 v1(163.4,99.6)
  Bottom Layer w0.2: v1(163.4,99.6) 163.4,99.5 164.55,98.35 U5.60
LCD_B2: U1.79 U5.61 | length 42.9
  Top Layer w0.2: U1.79 139.743,112.594 139.743,112.643 142.657,115.557 144.941,115.557 161.498,99 170.8,99 v1(171.8,98)
  Bottom Layer w0.2: v1(171.8,98) 172,98 172.05,98.05 U5.61
LCD_B3: U1.78 U5.62 | length 39.3
  Top Layer w0.2: U1.78 140.095,112.381 140.095,112.495 142.805,115.205 144.595,115.205 161.4,98.4 v1(162.9,98.4)
  Bottom Layer w0.2: v1(162.9,98.4) 163.55,97.75 U5.62
LCD_B4: U1.77 U5.63 | length 42.5
  Top Layer w0.2: U1.77 139.653,111.305 140.448,112.1 140.448,112.348 142.952,114.852 144.148,114.852 161.2,97.8 170.8,97.8 171.4,97.2 v1(171.6,97.2)
  Bottom Layer w0.2: v1(171.6,97.2) 172.125,97.2 172.375,97.45 U5.63
LCD_B5: U1.76 U5.64 | length 38.8
  Top Layer w0.2: U1.76 140.8,111.954 140.8,112.2 143.1,114.5 143.7,114.5 161.1,97.1 v1(168.2,97.1)
  Bottom Layer w0.2: v1(168.2,97.1) 169.775,97.1 U5.64
LCD_B6: U1.72 U5.65 | length 39.2
  Top Layer w0.2: U1.72 142.308,111.2 146,111.2 160.7,96.5 171.6,96.5 171.8,96.3 v1(171.8,96.2)
  Bottom Layer w0.2: v1(171.8,96.2) 172.45,96.85 U5.65
LCD_B7: U1.71 U5.66 | length 35.9
  Top Layer w0.2: U1.71 142.474,110.8 145.5,110.8 160.5,95.8 v1(169.7,95.8)
  Bottom Layer w0.2: v1(169.7,95.8) 169.825,95.925 U5.66
LCD_CLK: U1.45 U5.36 U31.1 | length 54.5
  Top Layer w0.2: U1.45 138.42,99.7 v1(138.9,99.7)
  Bottom Layer w0.2: U31.1 145.4,100.1 144.4,101.1 141.5,101.1 140.1,99.7 v1(138.9,99.7) 135.7,99.7 135,100.4 135,103.2 138.9,107.1 159.5,107.1 160.7,105.9 168.7,105.9 169.05,105.55 U5.36
LCD_CP_F: C9.1 U5.26 | length 7.9
  Top Layer w0.2: C9.1@165.5,109.1 165.5,108.4 165.8,108.1 167.6,108.1 168.05,108.55 170.75,108.55 v1(171,108.3)
  Bottom Layer w0.2: U5.26 170.75,108.55 v1(171,108.3)
LCD_CP_H: C31.2 U5.15 | length 11.8
  Top Layer w0.2: v1(164.3,115) 164.5,114.8 C31.2@165.5,114.8 ; C31.2@165.5,114.7 C31.2@165.5,114.8 ; v1(171,112.1) 170,113.1 170,114.2 168.6,115.6 165.8,115.6 165.5,115.3 C31.2@165.5,114.8
  Bottom Layer w0.2: v1(171,112.1) 171.25,111.85 U5.15
LCD_CP_S: C10.2 U5.25 | length 13.1
  Top Layer w0.2: v1(161.2,109.9) 161.7,109.4 C10.2
  Inner2 w0.2: v1(161.2,109.9) 161.443,109.657 171.343,109.657 171.8,109.2 v1(172,109.2)
  Bottom Layer w0.2: v1(172,109.2) 172.35,108.85 U5.25
LCD_CP_U: C32.1 U5.16 | length 10.2
  Top Layer w0.2: C32.1 162.6,114.3 v1(162.6,115)
  Bottom Layer w0.2: v1(162.6,115) 162.6,114.8 163.8,113.6 166.8,113.6 168.85,111.55 U5.16
LCD_CP_Z: C35.2 U5.8 | length 10.4
  Top Layer w0.2: C35.2 165.4,119.5 165.6,119.7 167.7,119.7 v1(167.9,119.5)
  Bottom Layer w0.2: v1(167.9,119.5) 168.2,119.2 168.2,114.9 169.15,113.95 U5.8
LCD_G0: U1.70 U5.51 | length 36.8
  Top Layer w0.2: U1.70 142.64,110.4 145,110.4 153.5,101.9 v1(153.5,101.5) ; v1(167.6,101) 167.6,101.1 168.2,101.7 v1(171.5,101.7)
  Bottom Layer w0.2: v1(153.5,101.5) 153.6,101.6 159,101.6 159.357,101.243 167.357,101.243 v1(167.6,101) ; v1(171.5,101.7) 172.15,101.05 U5.51
LCD_G1: U1.69 U5.52 | length 33
  Top Layer w0.2: U1.69 142.805,110 144.7,110 152.2,102.5 152.2,101.9 153.2,100.9 v1(154.2,100.9)
  Bottom Layer w0.2: v1(154.2,100.9) 154.3,100.8 166.4,100.8 167,100.2 168.3,100.2 168.85,100.75 U5.52
LCD_G2: U1.68 U5.53 | length 35.8
  Top Layer w0.2: U1.68 142.971,109.6 144.4,109.6 151.5,102.5 151.5,101.7 153,100.2 v1(153.6,100.2)
  Inner2 w0.2: v1(165.808,100.2) 171.8,100.2 v1(172,100.4)
  Bottom Layer w0.2: v1(153.6,100.2) v1(165.808,100.2) ; v1(172,100.4) 172.05,100.45 U5.53
LCD_G3: U1.67 U5.54 | length 34.8
  Top Layer w0.2: U1.67 143.037,109.1 144.1,109.1 149.7,103.5 v1(149.7,103.4) ; v1(162.3,103.2) 164,103.2 167.1,100.1 170.3,100.1 v1(171.1,100.9)
  Bottom Layer w0.2: v1(149.7,103.4) 149.9,103.2 v1(162.3,103.2) ; U5.54 170.55,100.15 171.1,100.7 v1(171.1,100.9)
LCD_G4: U1.63 U5.55 | length 44.7
  Top Layer w0.2: U1.63 143.253,105.05 146.351,105.05 157.9,93.5 174.2,93.5 174.9,94.2 174.9,99.3 v1(174.4,99.8)
  Bottom Layer w0.2: U5.55 173.125,99.8 v1(174.4,99.8)
LCD_G5: U1.62 U5.56 | length 43.4
  Top Layer w0.2: U1.62 143.04,104.697 146.004,104.697 157.8,92.9 v1(172.6,92.9)
  Bottom Layer w0.2: U5.56 170.35,99.55 170.8,99.1 170.8,95.4 172.6,93.6 v1(172.6,92.9)
LCD_G6: U1.61 U5.57 | length 44.8
  Top Layer w0.2: U1.61 142.198,105.04 142.894,104.344 145.556,104.344 157.7,92.2 v1(173.5,92.2) ; v1(174,94.3) 174.2,94.5 v1(174.2,98.7)
  Bottom Layer w0.2: U5.57 173.65,99.25 v1(174.2,98.7) ; v1(173.5,92.2) 173.5,93.8 v1(174,94.3)
LCD_G7: U1.60 U5.58 | length 30.4
  Top Layer w0.2: U1.60 142.705,103.9 144.5,103.9 145.9,102.5 v1(146.4,102.5) ; v1(160.1,102) 161.9,102 v1(164.3,99.6)
  Bottom Layer w0.2: v1(146.4,102.5) 159.6,102.5 v1(160.1,102) ; v1(164.3,99.6) 164.95,98.95 U5.58
LCD_HSYNC: U1.44 U5.37 U30.1 | length 54.7
  Top Layer w0.2: v1(134.1,102.2) 135.8,102.2 136.5,101.5 136.5,101.054 U1.44 138.754,98.8 U30.1
  Inner2 w0.2: v1(157.6,107.8) 159.2,106.2 159.8,106.2 160.1,105.9 164.4,105.9 166,107.5 169.1,107.5 169.4,107.2 169.4,106 170.4,105 v1(170.8,105)
  Bottom Layer w0.2: v1(134.1,102.2) 134.1,103.1 138.8,107.8 v1(157.6,107.8) ; v1(170.8,105) 171,105.2 171.2,105.2 171.25,105.25 U5.37
LCD_R0: U1.59 U5.43 U14.1 | length 38.3
  Top Layer w0.2: U1.59 142.54,103.5 144.3,103.5 v1(150.8,97) ; v1(155,97.6) 156.2,96.4 v1(157.3,96.4)
  Inner2 w0.2: v1(157.3,96.4) 161.7,100.8 166.6,100.8 168.2,102.4 v1(170.9,102.4)
  Bottom Layer w0.2: v1(150.8,97) 154.4,97 v1(155,97.6) ; v1(170.9,102.4) 171.6,103.1 172.2,103.1 172.55,103.45 U5.43
LCD_R1: U1.35 U5.44 U15.1 | length 55.1
  Top Layer w0.2: U1.35 135.563,96.9 135.8,96.9 139.2,93.5 148.8,93.5 150.8,95.5 ; U15.1 150.8,95.5 ; v1(148.3,104) v1(151,101.3) ; v1(151.2,95.9) 150.8,95.5
  Inner2 w0.2: v1(159.2,104.7) 163.6,104.7 164.4,103.9 v1(168.3,103.9)
  Bottom Layer w0.2: v1(148.3,104) 158.5,104 v1(159.2,104.7) ; v1(151,101.3) 150.1,100.4 150.1,96.4 150.6,95.9 v1(151.2,95.9) ; v1(168.3,103.9) 169.05,103.15 U5.44
LCD_R2: U1.86 U5.45 U16.1 | length 50.7
  Top Layer w0.2: U1.86 140.389,117.2 146.2,117.2 154.668,108.732 ; U16.1 155.732,108.732 154.668,108.732 ; v1(158.8,105.7) 158.4,106.1 157.3,106.1 154.668,108.732
  Inner2 w0.2: v1(158.8,105.7) 159.405,105.7 159.805,105.3 165.2,105.3 166,104.5 168.8,104.5 169,104.3 169,103.8 169.7,103.1 174.5,103.1 v1(175.4,102.2)
  Bottom Layer w0.2: U5.45 174.75,102.85 v1(175.4,102.2)
LCD_R3: U1.85 U5.46 U17.1 | length 45.5
  Top Layer w0.2: U1.85 140.454,116.7 145.9,116.7 157.2,105.4 v1(157.7,105.4) ; U17.1 159.6,109.2 160.252,108.548 v1(160.252,103.9)
  Inner2 w0.2: v1(157.7,105.4) 159.2,103.9 v1(160.252,103.9) 162.9,103.9 163.6,103.2 v1(167.5,103.2)
  Bottom Layer w0.2: v1(167.5,103.2) 168.2,103.2 168.8,102.6 169.775,102.6 U5.46
LCD_R4: U1.31 U5.47 U18.1 | length 60.8
  Top Layer w0.2: U1.31 131.3,96.797 131.3,95.1 133.6,92.8 137.515,92.8 ; v1(137.8,93.6) 137.515,93.315 137.515,92.8 ; v1(152.3,95.5) 149.6,92.8 137.515,92.8
  Inner2 w0.2: v1(152.3,95.5) 153,96.2 154.1,96.2 154.7,95.6 167.9,95.6 171.7,99.4 173,99.4 174.2,100.6 v1(174.2,101.7)
  Bottom Layer w0.2: v1(137.8,93.6) 142.4,93.6 U18.1 ; U5.47 173.65,102.25 v1(174.2,101.7)
LCD_R5: U1.30 U5.48 U19.1 | length 56.1
  Top Layer w0.2: U1.30 130.8,96.863 130.8,94.6 133.3,92.1 150.2,92.1 v1(153.3,95.2)
  Inner2 w0.2: v1(156.5,97.9) 157,97.9 161.6,102.5 v1(167,102.5)
  Bottom Layer w0.2: U19.1 149.5,91.4 v1(153.3,95.2) 153.8,95.2 v1(156.5,97.9) ; v1(167,102.5) 167.9,102.5 168.45,101.95 U5.48
LCD_R6: U1.29 U5.49 U20.1 | length 61.6
  Top Layer w0.2: U1.29 130.3,96.929 130.3,94.1 132.9,91.5 150.4,91.5 152.5,93.6 v1(155,93.6) 157,91.6 U20.1
  Inner2 w0.2: v1(158.1,96.3) 164.7,96.3 168.2,99.8 172.6,99.8 173,100.2 173,101.5 v1(172.1,102.4)
  Bottom Layer w0.2: v1(155,93.6) 155.4,93.6 v1(158.1,96.3) ; v1(172.1,102.4) 172.1,101.9 172.35,101.65 U5.49
LCD_R7: U1.28 U5.50 U21.1 | length 55.3
  Top Layer w0.2: U1.28 129.9,97.095 129.9,93.5 132.5,90.9 150.9,90.9 v1(152.7,92.7) 153.4,92 U21.1
  Inner2 w0.2: v1(157.3,97.4) 161.7,101.8 v1(166.5,101.8)
  Bottom Layer w0.2: v1(152.7,92.7) 152.7,92.8 v1(157.3,97.4) ; v1(166.5,101.8) 167.9,101.8 168.35,101.35 U5.50
LCD_SPI_CS: P2.5 U35.1 U60.2 | length 63.5
  Top Layer w0.2: v1(134.2,124.6) 134.8,125.2 v1(145.6,125.2) ; U60.2 176.099,125.099 v1(176.6,125.6)
  Bottom Layer w0.2: P2.5 126.29,124.6 v1(134.2,124.6) 136.1,122.7 136.1,120.736 134.564,119.2 U35.1 ; v1(145.6,125.2) 176.2,125.2 v1(176.6,125.6)
LCD_SPI_CS_3V3: U5.41 U46.1 U60.13 | length 38.6
  Top Layer w0.2: U46.1 173,91.4 174,91.4 174.8,92.2 174.8,93 175.7,93.9 v1(175.7,100.6) ; v1(175,104) 176.2,104 176.8,104.6 176.8,116.7 176.1,117.4 U60.13
  Bottom Layer w0.2: U5.41 173.125,104 v1(175,104) 175.4,104 176.4,103 176.4,101.3 v1(175.7,100.6)
LCD_SPI_DI: P2.1 U34.1 U60.4 | length 64.2
  Top Layer w0.2: P2.1 130.07,127.63 133.8,123.9 136.4,123.9 v1(136.9,123.4) ; v1(174.7,126) 175.099,125.602 U60.4
  Bottom Layer w0.2: P2.1 128.34,126.76 129.1,126 v1(174.7,126) ; v1(136.9,123.4) 136.9,121.5 U34.1
LCD_SPI_DI_3V3: U5.40 U60.11 U62.1 | length 36.5
  Top Layer w0.2: U60.11 175.1,116.8 175.5,116.4 175.5,108.6 171.6,104.7 v1(171.6,104.3) 172.3,104.3 173.5,103.1 176.4,103.1 177.3,102.2 177.3,93.3 U62.1
  Bottom Layer w0.2: U5.40 171.25,104.35 171.3,104.3 v1(171.6,104.3)
LCD_SPI_SCK: P2.3 U33.1 U60.3 | length 70
  Top Layer w0.2: P2.3 125.8,126.7 127.1,125.4 131,125.4 134,122.4 U33.1 ; U60.3 175.598,125.998 v1(176.1,126.5)
  Bottom Layer w0.2: P2.3 128.13,125.3 139.5,125.3 140.3,124.5 170.3,124.5 171.7,123.1 175.3,123.1 177.5,125.3 177.5,126.1 177.1,126.5 v1(176.1,126.5)
LCD_SPI_SCK_3V3: U5.39 U60.12 U61.1 | length 36.6
  Top Layer w0.2: v1(175.3,105.4) 176.1,106.2 176.1,116.6 175.6,117.1 U60.12
  Bottom Layer w0.2: U5.39 174.55,104.65 v1(175.3,105.4) 177.4,103.3 177.4,96.6 174.8,94 174.8,90.1 U61.1
LCD_VCOM: C29.1 R6.2 U5.67 | length 35.3
  Top Layer w0.2: v1(164.3,109.1) 164.3,109.9 165.5,111.1 165.4,111.2 v1(165.4,111.9) ; v1(164.7,107.1) 164.947,107.1 R6.2
  Inner2 w0.2: v1(165.4,111.9) 165.4,111.8 167.1,110.1 172.4,110.1 176.6,105.9 176.6,98.3 v1(173,94.7)
  Bottom Layer w0.2: v1(164.3,109.1) 164.3,107.6 164.7,107.2 v1(164.7,107.1) ; v1(173,94.7) 173.3,94.7 173.7,95.1 173.7,95.885 173.335,96.25 U5.67
LCD_VSYNC: U1.43 U5.38 U32.1 | length 45.7
  Top Layer w0.2: v1(135.8,101.2) 137.04,99.96 U1.43 140.9,96.089 U32.1
  Bottom Layer w0.2: v1(135.8,101.2) 135.8,103.1 139.1,106.4 159.4,106.4 160.6,105.2 168.3,105.2 168.55,104.95 U5.38
LED+: C26.1 D1.1 U5.2 U5.5 U51.1 ZD2.1 | length 32.4
  Top Layer w0.5: ZD2.1@157.792,124 157.792,121.793 D1.1 157.5,120.3 C26.1 158.8,117.2 159.6,118 U51.1
  Inner2 w0.3: v1(169.4,116.4) 172.7,116.4 v1(174.1,115)
  Bottom Layer w0.2: v1(169.4,116.4) 169.825,115.975 U5.2 ; U5.5 173.95,114.85 v1(174.1,115)
  Bottom Layer w0.3: U51.1 159.8,119.2 161.3,120.7 168.4,120.7 169.3,119.8 169.3,116.5 v1(169.4,116.4)
LED-: H6.2 R5.2 U5.1 U5.6 U52.1 | length 36.4
  Top Layer w0.3: R5.2 148.8,125.1 149.3,125.6 163.7,125.6 165.4,123.9 H6.2 165.4,121.5 166.1,120.8 170.9,120.8 171.2,120.5 171.2,117.8 v1(171.5,117.5)
  Bottom Layer w0.2: U5.6 170.85,114.55 171.602,115.302 172.35,116.05 U5.1
  Bottom Layer w0.3: v1(171.5,117.5) 171.602,117.399 171.602,115.302
OSC1: C2.2 H3.1 X1.1 | length 9.7
  Top Layer w0.2: X1.1 116.807,98.053 ; C2.2 117.553,98.053 116.807,98.053 ; H3.1 116.807,98.053
OSC2: H4.1 R1.2 | length 2.5
  Top Layer w0.2: R1.2 118.553,92.407 H4.1
SSD_CLK: H1.2 U1.15 | length 22
  Top Layer w0.2: U1.15 128.252,102.8 v1(128.8,102.8) ; v1(128.5,119) H1.2
  Bottom Layer w0.2: v1(128.5,119) 128.5,104 128.8,103.7 v1(128.8,102.8)
SSD_PWM: H5.1 U1.51 U45.1 | length 33.6
  Top Layer w0.2: v1(132.4,120.8) 136.76,120.8 H5.1 138.86,122.64 U45.1 ; v1(135.1,107.1) 138.5,103.7 138.5,103.014 U1.51
  Bottom Layer w0.2: v1(132.4,120.8) 132.8,120.4 132.8,109.4 v1(135.1,107.1)
SSD_XTAL_IN: H3.2 U1.22 | length 10.1
  Top Layer w0.2: H3.2 121.4,96.8 122.3,97.7 127.111,97.7 U1.22
SSD_XTAL_OUT: H4.2 U1.24 | length 11.6
  Top Layer w0.2: H4.2 121.4,92.2 123.4,94.2 124.743,94.2 U1.24
"": H4.3 P1.1 P1.3 P1.5 P1.7 P1.9 P1.11 P1.13 P1.15 P2.2 P2.4 P2.8 P2.10 P2.12 P3.1 P3.2 P3.3 P3.4 P3.5 P3.6 P3.7 P3.8 P3.9 P3.10 P3.11 P3.12 P3.13 P3.14 P3.15 P3.16 P4.1 P4.2 P4.3 P4.4 P4.5 P4.6 P4.7 P4.8 P4.9 P4.10 P4.11 P4.12 P4.13 P4.14 P4.15 P4.16 P5.3 P5.4 P5.5 P5.6 P5.7 P5.8 P5.13 P5.14 P5.15 P5.16 P6.1 P6.2 P6.3 P6.4 P6.5 P6.6 P6.7 P6.8 P6.9 P6.10 P6.11 P6.12 P6.13 P6.14 P6.15 P6.16 U1.36 U1.37 U1.38 U1.39 U1.49 U1.52 U1.53 U1.87 U1.88 U1.89 U1.90 U1.91 U1.92 U1.98 U1.99 U1.103 U1.104 U1.105 U1.106 U1.107 U1.111 U1.112 U1.113 U3.4 U5.3 U5.4 U5.11 U5.12 U5.29 U5.32 U5.42 U5.MP1 U5.MP2 U60.6 U60.9 U60.10

## Polygon pours and split planes (outlines as drawn)
GND on Inner1 (solid, remove dead copper, pour order 0): 76.2,76.2 180.5,76.2 180.5,138.5 76.2,138.5
3V3 on Inner2 (solid, pour order 1): 107.5,102.8 134.8,102.9 145.8,113.8 154.3,114 154.4,98.1 146.5,90.2 107.6,90.2
1V8 on Inner2 (solid, pour order 2): 91.3,104.7 133.1,104.8 145.124,116.7 150.46,116.7 150.3,119.7 177.3,119.8 177.3,125.8 91.6,125.6

## Keep-outs
Board Outline Layer:
  lines w0.254 net "": 86.95,126.15 86.95,131.4 87.7,132.15 174.2,132.15 179.95,126.4 179.95,90.9 173.95,84.9 135.45,84.9 133.95,83.4 133.95,78.65 132.95,77.65 91.45,77.65 90.449,78.651 90.2,125.15 89.7,125.65 87.45,125.65 86.95,126.15

## Silkscreen, mask and mechanical layers (free items; w line width, h text height)
Top Silkscreen Layer:
  text "DC" at 115.253,126 h1.14
  text "L_CK" at 132.653,125.5 h1.14
  text "D6" at 106.453,125.2 h1.14
  text "D1" at 98.688,124.97 h1.14
  text "TE" at 121.882,123.175 h1.14
  text "LED+" at 161.053,121.3 h1.14
  text "D7" at 113.353,121.2 h1.14
  text "CS" at 135.453,120.6 h1.14
  text "D0" at 98.482,120.275 h1.14
  text "GND" at 90.729,120.154 h1.14
  text "RW" at 119.182,119.375 h1.14
  text "LED-" at 168.853,119.2 h1.14
  text "D5" at 110.034,118.275 h1.14
  text "DI" at 138.253,118.1 h1.14
  text "PWM" at 142.103,118.1 h1.14
  text "CS" at 104.858,116.775 h1.14
  text "D4" at 110.653,113.4 h1.14
  text "D3" at 99.158,113.375 h1.14
  text "D2" at 103.353,111.9 h1.14
  text "E" at 118.1,111.406 h1.14
  text "R2" at 152.553,110 h1.14
  text "1V2" at 100.303,109.3 h1.14
  text "R3" at 158.353,107.6 h1.14
  text "1V8" at 95.703,106.8 h1.14
  text "3V3" at 108.945,102.475 h1.14
  text "R0" at 147.93,102.229 h1.14
  text "CLK" at 144.003,102.2 h1.14
  text "HS" at 138.353,99.2 h1.14
  text "SPI_3V3" at 170.004,96.2 h1.14
  text "VS" at 139.853,94 h1.14
  text "R1" at 146.953,94 h1.14
  text "L_CK" at 170.753,94 h1.14
  text "R4" at 143.576,93.975 h1.14
  text "GND" at 159.903,93 h1.14
  text "CS" at 167.953,92.6 h1.14
  text "DI" at 176.453,91.6 h1.14
  text "A.C.M /  Nov 21 2022" at 159.038,89.946 h1.45
  text "5V" at 96.653,89.7 h1.14
  text "6800 -> COM50 /  SSD1963 Controller board" at 118.428,89.646 h1.45
  text "R5" at 148.453,87.3 h1.14
  text "R7" at 152.458,87.275 h1.14
  text "R6" at 156.058,87.275 h1.14
  text "GND" at 105.203,85.2 h1.14